# Altium PCB lpf.PcbDoc
Units mm, origin at the board's own origin, x right, y up, seen from the top; angles counter-clockwise.
Board outline 50.25 x 50.25 mm, 2 copper layers (Top Layer, Bottom Layer); 47 components, 39 nets, 120 pads, 0 vias.
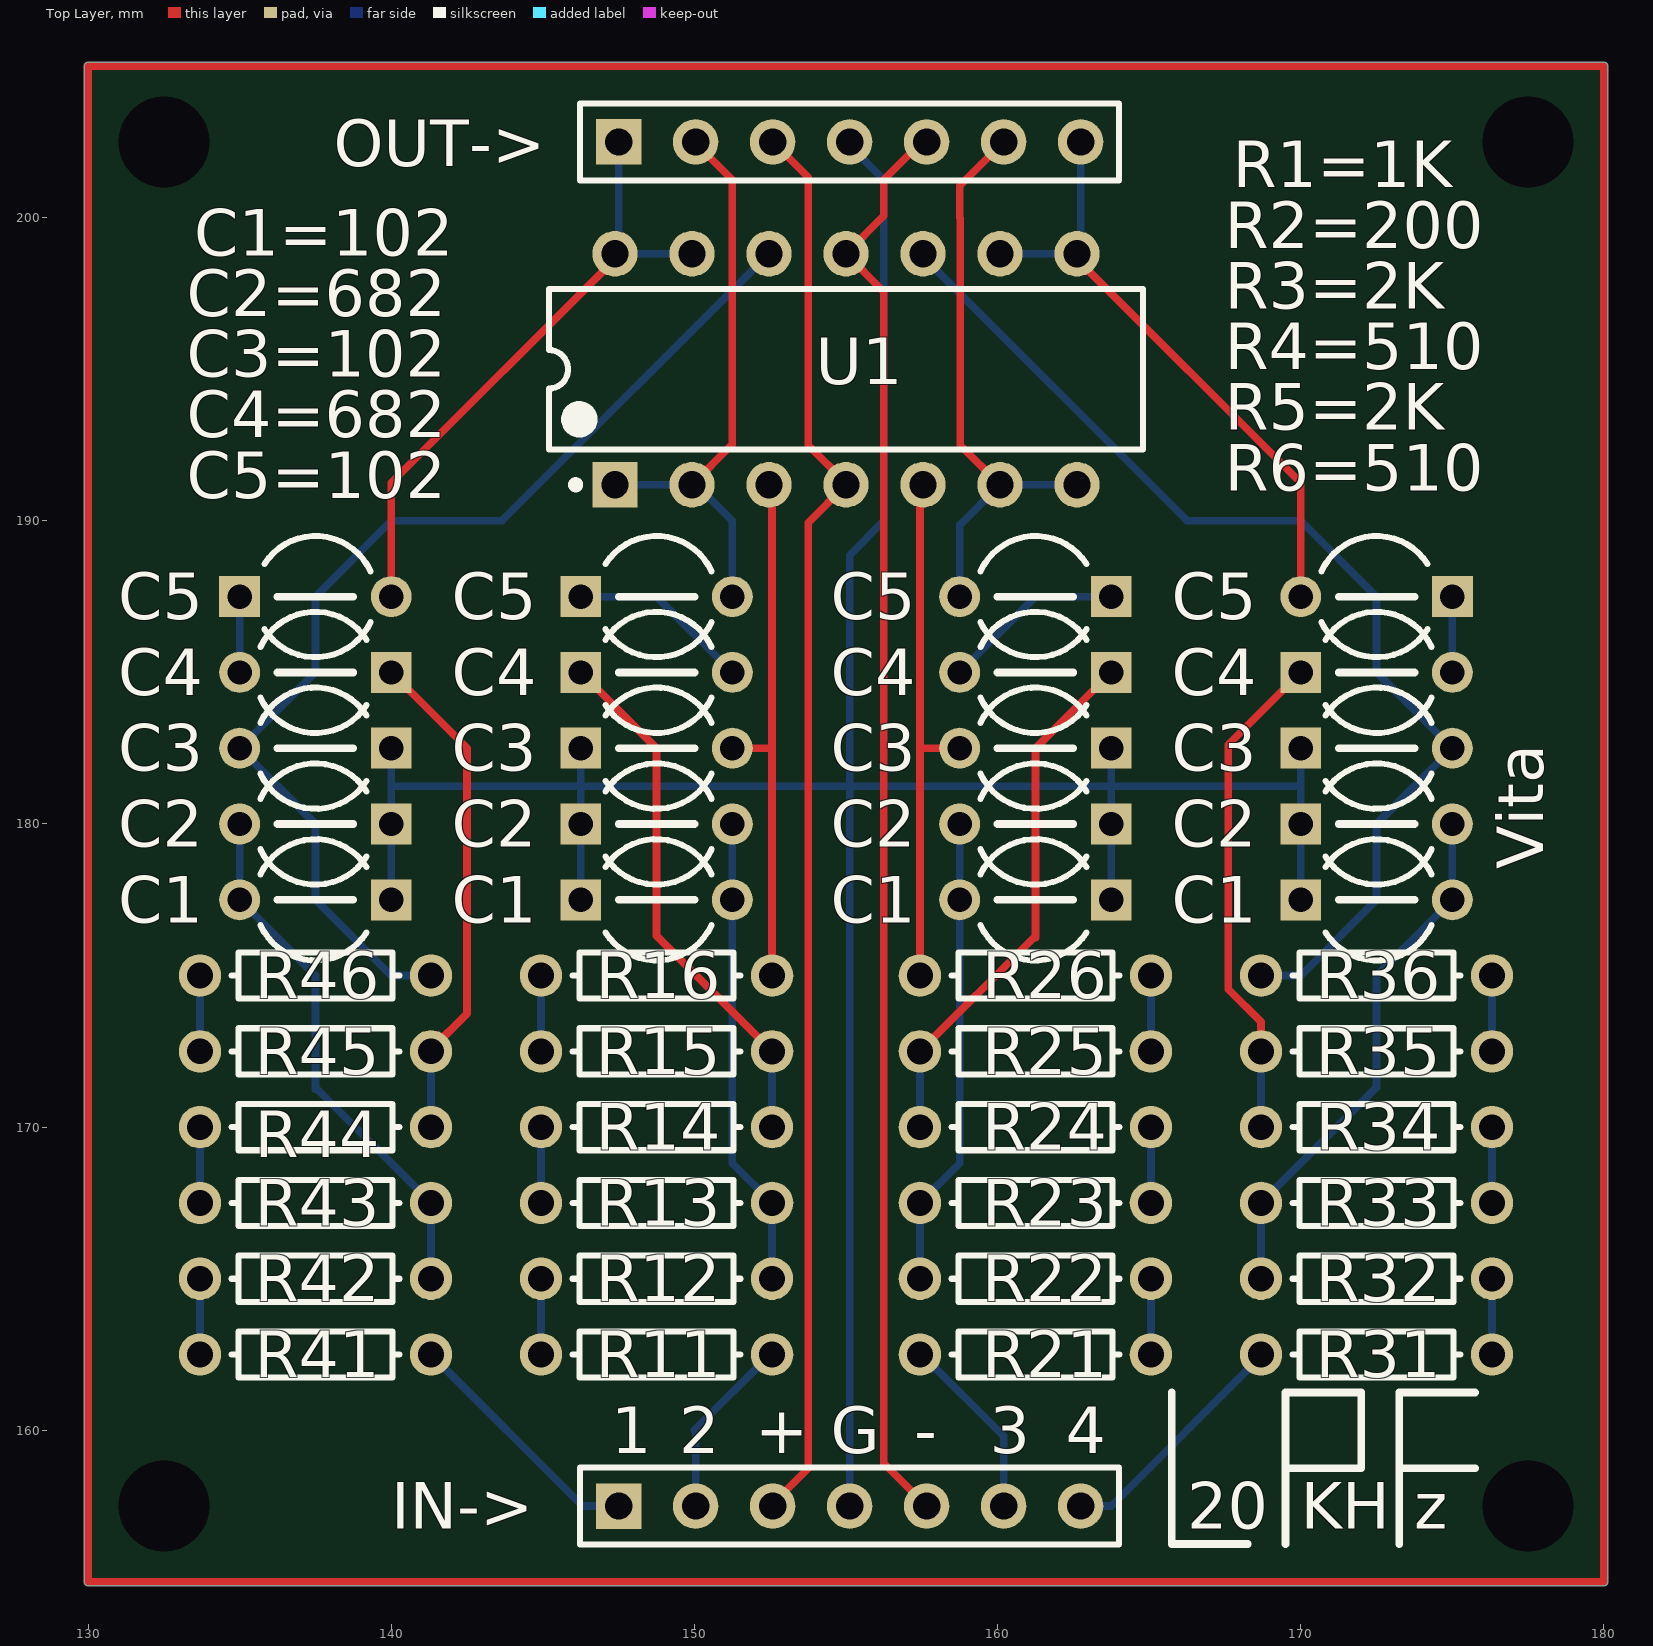
[diagram p0: Top Layer view]
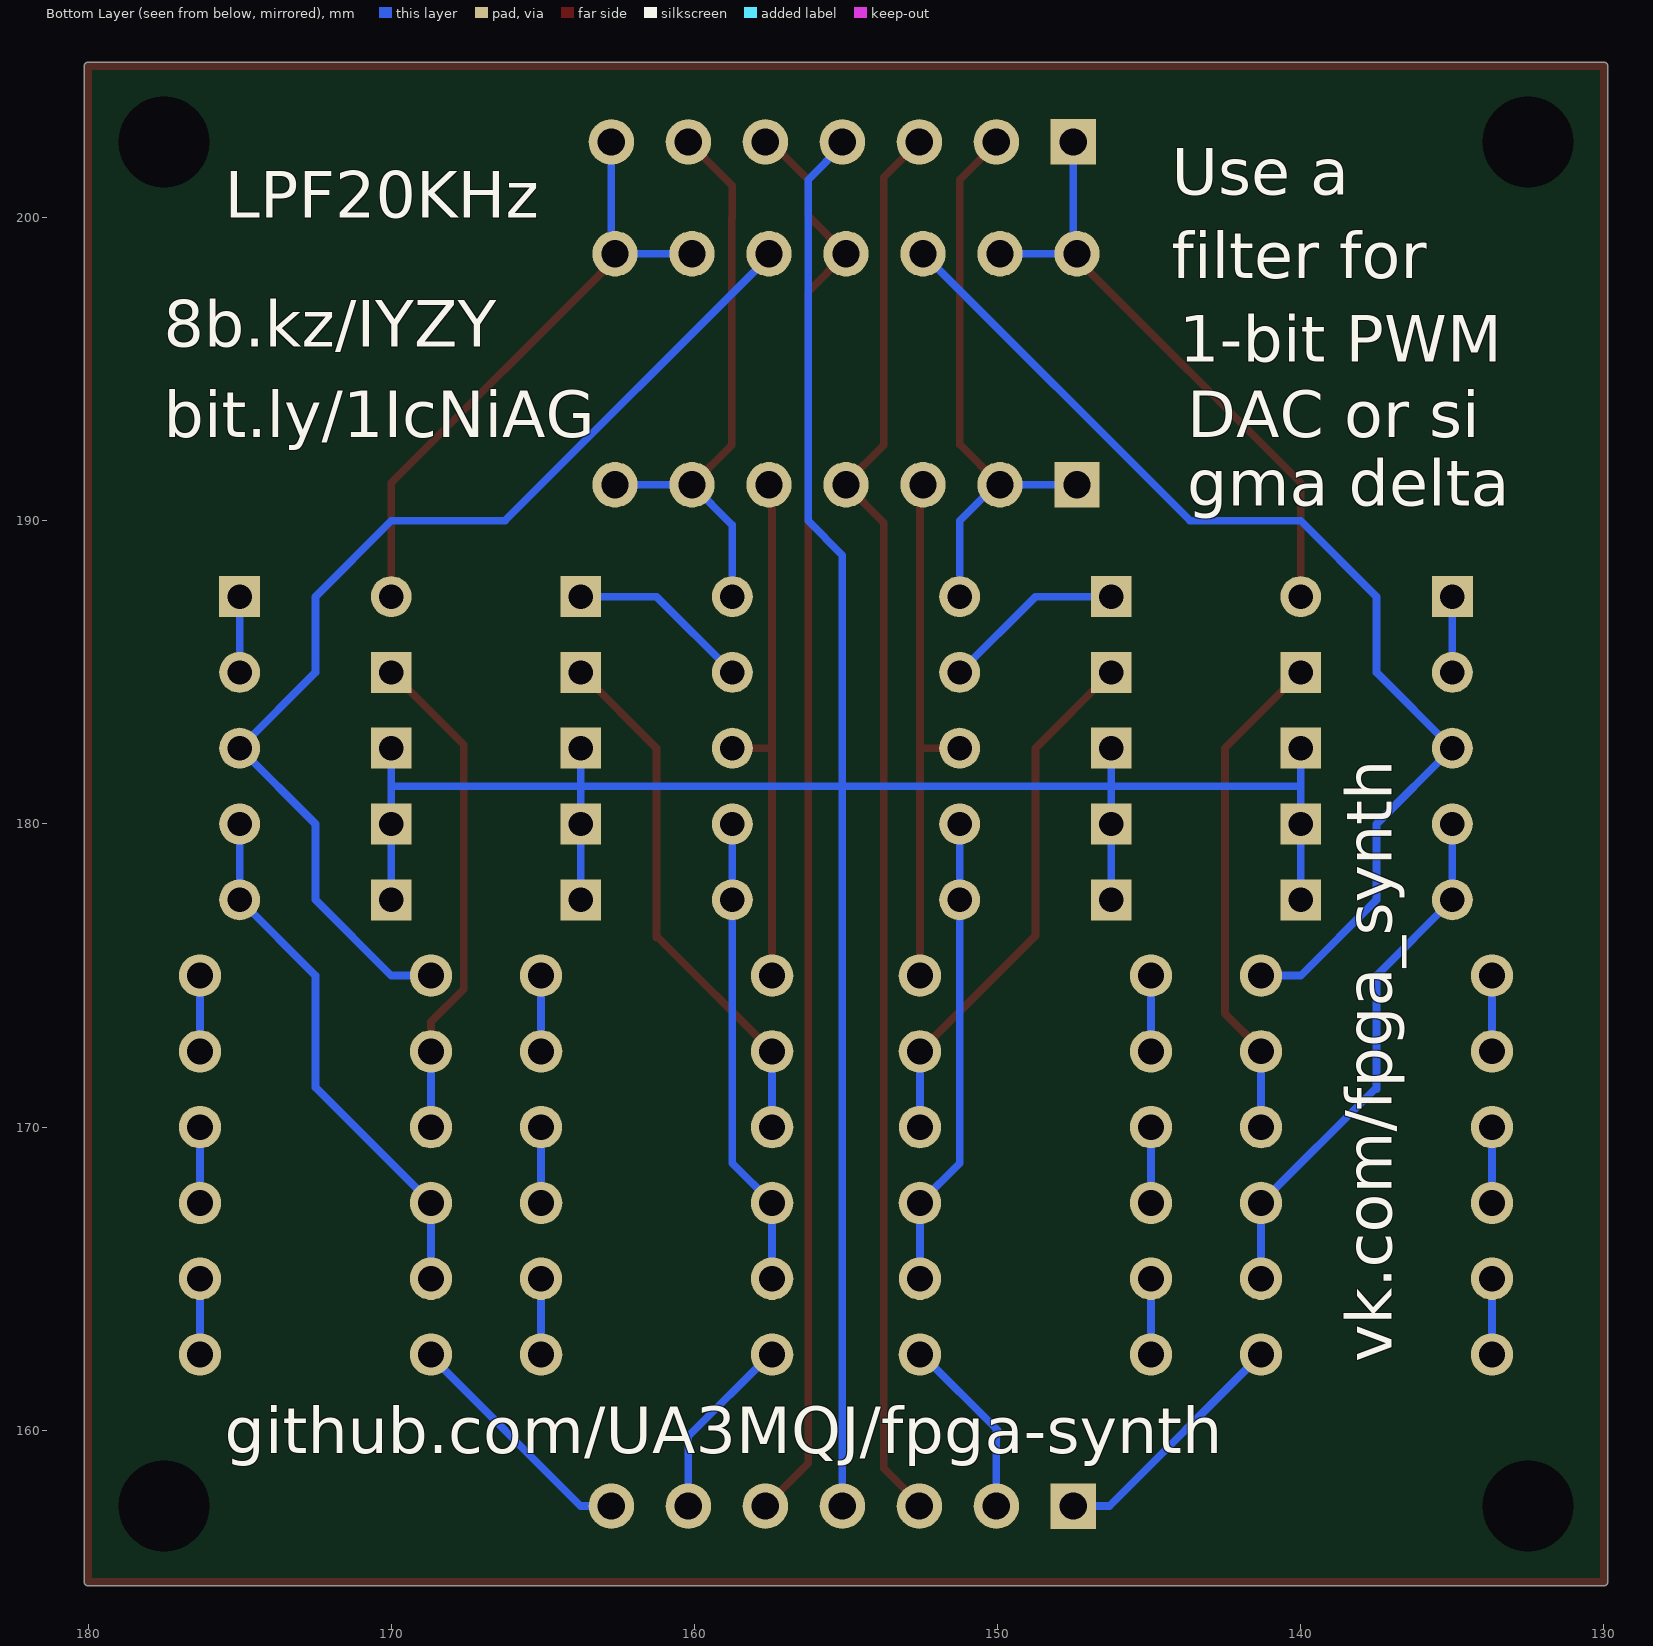
[diagram p1: Bottom Layer view, seen from below]

## Layer stack, top to bottom
Top Solder: solder mask 0.0102, Solder Resist, Dk 3.5
Top Layer: signal copper 0.0356
Dielectric 1: dielectric 0.32, FR-4, Dk 4.8
Bottom Layer: signal copper 0.0356
Bottom Solder: solder mask 0.0102, Solder Resist, Dk 3.5

## Board outline
130,154.873 cw(c130,155) 129.873,155 129.873,205 cw(c130,205) 130,205.127 180,205.127 cw(c180,205) 180.127,205 180.127,155 cw(c180,155) 180,154.873

## Design rules (kind name [scope] priority, off if disabled: settings)
Clearance [All] p1: gap=0.254
PolygonConnect [All] p1: connectstyle=Relief reliefconductorwidth=0.254 reliefentries=4 polygonreliefangle="90 Angle" airgapwidth=0.254
RoutingVias [All] p1: holewidth=0.711 width=1.27 viastyle="Through Hole" minholewidth=0.711 minwidth=1.27 maxholewidth=0.711 maxwidth=1.27
SolderMaskExpansion [All] p1: expansion=0.102
Width [All] p1: maxlimit=0.254 minlimit=0.254 preferedwidth=0.254
29 further rules are at their usual default settings.

## Classes and differential pairs
component class lpf: 1 C1 C2 C3 C4 C5 OUT-> P_vcc2 R11 R12 R13 R14 R15 R16 R21 R22 R23 R24 R25 R26 R31 R32 R33 R34 R35 R36 R41 R42 R43 R44 R46 U1

## Components (designator, comment, footprint, x,y, rotation, side; value= is the part's Value field where it differs from the comment)
1 "Header 7" HDR1X7 147.5,157.5 r0 top (schematic designator P_in)
C1 "Cap2" CAPR5-4X5 148.75,177.5 r0 top (schematic designator C11)
C1 "Cap2" CAPR5-4X5 137.5,177.5 r180 top (schematic designator C41)
C1 "Cap2" CAPR5-4X5 172.5,177.5 r0 top (schematic designator C31)
C1 "Cap2" CAPR5-4X5 161.25,177.5 r180 top (schematic designator C21)
C2 "Cap2" CAPR5-4X5 137.5,180 r180 top (schematic designator C42)
C2 "Cap2" CAPR5-4X5 172.5,180 r0 top (schematic designator C32)
C2 "Cap2" CAPR5-4X5 161.25,180 r180 top (schematic designator C22)
C2 "Cap2" CAPR5-4X5 148.75,180 r0 top (schematic designator C12)
C3 "Cap2" CAPR5-4X5 137.5,182.5 r180 top (schematic designator C43)
C3 "Cap2" CAPR5-4X5 172.5,182.5 r0 top (schematic designator C33)
C3 "Cap2" CAPR5-4X5 161.25,182.5 r180 top (schematic designator C23)
C3 "Cap2" CAPR5-4X5 148.75,182.5 r0 top (schematic designator C13)
C4 "Cap2" CAPR5-4X5 137.5,185 r180 top (schematic designator C44)
C4 "Cap2" CAPR5-4X5 172.5,185 r0 top (schematic designator C34)
C4 "Cap2" CAPR5-4X5 161.25,185 r180 top (schematic designator C24)
C4 "Cap2" CAPR5-4X5 148.75,185 r0 top (schematic designator C14)
C5 "Cap2" CAPR5-4X5 137.5,187.5 r0 top (schematic designator C45)
C5 "Cap2" CAPR5-4X5 172.5,187.5 r180 top (schematic designator C35)
C5 "Cap2" CAPR5-4X5 161.25,187.5 r180 top (schematic designator C25)
C5 "Cap2" CAPR5-4X5 148.75,187.5 r0 top (schematic designator C15)
OUT-> "Header 7" HDR1X7 147.5,202.5 r0 top (schematic designator P_out)
R11 "Res1" AXIAL-0.3 148.75,162.5 r180 top
R12 "Res1" AXIAL-0.3 148.75,165 r0 top
R13 "Res1" AXIAL-0.3 148.75,167.5 r180 top
R14 "Res1" AXIAL-0.3 148.75,170 r0 top
R15 "Res1" AXIAL-0.3 148.75,172.5 r180 top
R16 "Res1" AXIAL-0.3 148.75,175 r0 top
R21 "Res1" AXIAL-0.3 161.25,162.5 r0 top
R22 "Res1" AXIAL-0.3 161.25,165 r180 top
R23 "Res1" AXIAL-0.3 161.25,167.5 r0 top
R24 "Res1" AXIAL-0.3 161.25,170 r180 top
R25 "Res1" AXIAL-0.3 161.25,172.5 r0 top
R26 "Res1" AXIAL-0.3 161.25,175 r180 top
R31 "Res1" AXIAL-0.3 172.5,162.5 r0 top
R32 "Res1" AXIAL-0.3 172.5,165 r180 top
R33 "Res1" AXIAL-0.3 172.5,167.5 r0 top
R34 "Res1" AXIAL-0.3 172.5,170 r180 top
R35 "Res1" AXIAL-0.3 172.5,172.5 r0 top
R36 "Res1" AXIAL-0.3 172.5,175 r180 top
R41 "Res1" AXIAL-0.3 137.5,162.5 r180 top
R42 "Res1" AXIAL-0.3 137.5,165 r0 top
R43 "Res1" AXIAL-0.3 137.5,167.5 r180 top
R44 "Res1" AXIAL-0.3 137.5,170 r0 top
R45 "Res1" AXIAL-0.3 137.5,172.5 r180 top
R46 "Res1" AXIAL-0.3 137.5,175 r0 top
U1 "LT1125ACN" LT-N-14 155,195 r90 top

## Footprints (in the part's own frame and the unit in brackets; to place one, negate y for a bottom-side part, rotate by r counter-clockwise, add the part's x,y. Pads: shape width x height; smd on the part's side, far side on the other; paste and mask are expansions set on the pad)
AXIAL-0.3 [mm] "Axial Device, Thru-Hole; 2 Leads; 0.3 in Pin Spacing"
  round 1.4 hole 0.85: 1(-3.81,0) 2(3.81,0)
  silkscreen extent -2.77,-0.76 2.77,0.76
CAPR5-4X5 [mm] "Capacitor; 2 Leads"
  rect 1.35x1.35 hole 0.8: 1(-2.5,0)
  round 1.35 hole 0.8: 2(2.5,0)
  silkscreen extent -1.69,-2 1.82,2
HDR1X7 [mm] "Connector; Header; 7 Position"
  rect 1.5x1.5 hole 0.9: 1(0,0)
  round 1.5 hole 0.9: 2(2.54,0) 3(5.08,0) 4(7.62,0) 5(10.16,0) 6(12.7,0) 7(15.24,0)
  silkscreen extent -1.27,-1.27 16.51,1.27
LT-N-14 [mm] "DIP, 14-Leads, Body 19.558x6.477mm, Pitch 2.54mm"
  rect 1.5x1.5 hole 0.9: 1(-3.81,7.62)
  round 1.5 hole 0.9: 2(-3.81,5.08) 3(-3.81,2.54) 4(-3.81,0) 5(-3.81,-2.54) 6(-3.81,-5.08) 7(-3.81,-7.62) 8(3.81,-7.62) 9(3.81,-5.08) 10(3.81,-2.54) 11(3.81,0) 12(3.81,2.54) 13(3.81,5.08) 14(3.81,7.62)
  silkscreen extent -3.93,-9.8 2.65,9.8, body extent -3.95,-9.77 3.95,9.77, height 3.94

## Part data
1 OUT->: "Header, 7-Pin"
C1 C1 C1 C1 C2 C2 C2 C2 C3 C3 C3 C3 C4 C4 C4 C4 C5 C5 C5 C5: "Capacitor"
R11 R12 R13 R14 R15 R16 R21 R22 R23 R24 R25 R26 R31 R32 R33 R34 R35 R36 R41 R42 R43 R44 R45 R46: "Resistor"
U1: "Quad Channel, Low Noise Precision Operational Amplifier, Low 1/f Corner, 12.5 MHz Typical GBW, 4.5 V/us Typical SR, 8 to 44 V, 14-Pin DIP (N-14), Commercial"

## Free pads (board coordinates)
  round 1.524 hole 3 unplated: 0(132.5,157.5) 0(132.5,202.5) 0(177.5,157.5) 0(177.5,202.5)

## Nets (pads, with @x,y where several pads share a name; then routed paths per layer and width w, separated by ;. In a path a pad name is that pad's centre, name@x,y a point inside that pad or via, vN(x,y) a via of type N, cw(c..) or ccw(c..) an arc to the next point about the centre after c; other vN are vias at no path point)
GND: 1.4 C1.1 C2.1 C3.1 OUT->.4 | length 95.9
  Bottom Layer w0.254: C1.1@140,177.5 140,180 140,181.25 ; C3.1@140,182.5 140,181.25 ; C1.1@146.25,177.5 146.25,180 146.25,181.25 ; C3.1@146.25,182.5 146.25,181.25 ; 1.4 155.12,181.25 ; OUT->.4 155.12,202.38 156.25,201.25 156.25,190 155.12,188.87 155.12,181.25 ; C1.1@163.75,177.5 163.75,180 163.75,181.25 ; C3.1@163.75,182.5 163.75,181.25 ; C1.1@170,177.5 170,180 170,181.25 ; C3.1@170,182.5 170,181.25 ; 140,181.25 146.25,181.25 ; 146.25,181.25 155.12,181.25 ; 155.12,181.25 163.75,181.25 ; 163.75,181.25 170,181.25
IN1: 1.1 R41.1 | length 8.3
  Bottom Layer w0.254: R41.1 146.31,157.5 1.1
IN2: 1.2 R11.1 | length 6.1
  Bottom Layer w0.254: 1.2 150.04,159.96 150,160 152.5,162.5 R11.1
IN3: 1.6 R21.1 | length 6.2
  Bottom Layer w0.254: R21.1 157.5,162.5 160.2,159.8 1.6
IN4: 1.7 R31.1 | length 8.1
  Top Layer w0.254: R31.1@168.69,162.44 R31.1
  Bottom Layer w0.254: 1.7 163.75,157.5 168.69,162.44 R31.1
NetC11_2: C1.2@151.25,177.5 C2.2@151.25,180 R12.2 R13.1 | length 15.5
  Bottom Layer w0.254: C2.2@151.25,180 151.25,177.5 151.25,168.81 R13.1 R12.2
NetC13_2: C3.2@151.25,182.5 R16.2 U1.3 | length 17.5
  Top Layer w0.254: C3.2@151.25,182.5 152.56,182.5 ; U1.3 152.56,191.09 152.56,182.5 ; R16.2 152.56,182.5
NetC14_1: C4.1@146.25,185 R14.2 R15.1 | length 17.6
  Top Layer w0.254: C4.1@146.25,185 148.75,182.5 148.75,176.31 R15.1
  Bottom Layer w0.254: R14.2 R15.1
NetC14_2: C4.2@151.25,185 C5.1@146.25,187.5 | length 6
  Bottom Layer w0.254: C5.1@146.25,187.5 148.75,187.5 C4.2@151.25,185
NetC21_2: C1.2@158.75,177.5 C2.2@158.75,180 R22.2 R23.1 | length 15.5
  Bottom Layer w0.254: R23.1 158.75,168.81 158.75,177.5 C2.2@158.75,180 ; R22.2 R23.1
NetC23_2: C3.2@158.75,182.5 R26.2 U1.5 | length 17.5
  Top Layer w0.254: R26.2 157.44,182.5 ; U1.5 157.44,191.09 157.44,182.5 ; C3.2@158.75,182.5 157.44,182.5
NetC24_1: C4.1@163.75,185 R24.2 R25.1 | length 17.6
  Top Layer w0.254: R25.1 161.19,176.25 161.25,176.25 161.25,182.5 C4.1@163.75,185
  Bottom Layer w0.254: R24.2 R25.1
NetC24_2: C4.2@158.75,185 C5.1@163.75,187.5 | length 6
  Bottom Layer w0.254: C4.2@158.75,185 161.25,187.5 C5.1@163.75,187.5
NetC31_2: C1.2@175,177.5 C2.2@175,180 R32.2 R33.1 | length 17.7
  Top Layer w0.254: R33.1 R33.1@168.75,167.5
  Bottom Layer w0.254: R32.2 R33.1 172.5,171.31 172.5,175 175,177.5 C2.2@175,180
NetC33_2: C3.2@175,182.5 R36.2 U1.10 | length 36.6
  Bottom Layer w0.254: U1.10 157.54,198.71 166.25,190 170,190 172.5,187.5 172.5,185 175,182.5 172.5,180 172.5,177.5 170,175 R36.2
NetC34_1: C4.1@170,185 R34.2 R35.1 | length 16.4
  Top Layer w0.254: R35.1 168.69,173.471 167.609,174.552 167.609,182.609 C4.1@170,185
  Bottom Layer w0.254: R34.2 R35.1
NetC34_2: C4.2@175,185 C5.1@175,187.5 | length 2.5
  Bottom Layer w0.254: C4.2@175,185 C5.1@175,187.5
NetC41_2: C1.2@135,177.5 C2.2@135,180 R42.2 R43.1 | length 17.6
  Bottom Layer w0.254: C2.2@135,180 135,177.5 137.5,175 137.5,171.25 137.56,171.25 R43.1 R42.2
NetC43_2: C3.2@135,182.5 R46.2 U1.12 | length 36.6
  Bottom Layer w0.254: R46.2 140,175 137.5,177.5 137.5,180 135,182.5 137.5,185 137.5,187.5 140,190 143.65,190 U1.12
NetC44_1: C4.1@140,185 R44.2 R45.1 | length 16.5
  Top Layer w0.254: C4.1@140,185 142.5,182.5 142.5,173.75 141.31,172.56 R45.1
  Bottom Layer w0.254: R44.2 R45.1
NetC44_2: C4.2@135,185 C5.1@135,187.5 | length 2.5
  Bottom Layer w0.254: C4.2@135,185 C5.1@135,187.5
NetR11_2: R11.2 R12.1 | length 2.5
  Bottom Layer w0.254: R11.2 R12.1
NetR13_2: R13.2 R14.1 | length 2.5
  Bottom Layer w0.254: R13.2 R14.1
NetR15_2: R15.2 R16.1 | length 2.5
  Bottom Layer w0.254: R15.2 R16.1
NetR21_2: R21.2 R22.1 | length 2.5
  Bottom Layer w0.254: R21.2 R22.1
NetR23_2: R23.2 R24.1 | length 2.5
  Bottom Layer w0.254: R23.2 R24.1
NetR25_2: R25.2 R26.1 | length 2.5
  Bottom Layer w0.254: R25.2 R26.1
NetR31_2: R31.2 R32.1 | length 2.5
  Bottom Layer w0.254: R31.2 R32.1
NetR33_2: R33.2 R34.1 | length 2.5
  Bottom Layer w0.254: R33.2 R34.1
NetR35_2: R35.2 R36.1 | length 2.5
  Bottom Layer w0.254: R35.2 R36.1
NetR41_2: R41.2 R42.1 | length 2.5
  Bottom Layer w0.254: R41.2 R42.1
NetR43_2: R43.2 R44.1 | length 2.5
  Bottom Layer w0.254: R43.2 R44.1
NetR45_2: R45.2 R46.1 | length 2.5
  Bottom Layer w0.254: R45.2 R46.1
OUT1: C5.2@140,187.5 OUT->.1 U1.13 U1.14 | length 20.8
  Top Layer w0.254: C5.2@140,187.5 140,191.25 147.38,198.63 U1.14 ; OUT->.1@147.38,202.38 OUT->.1
  Bottom Layer w0.254: OUT->.1 147.5,198.93 U1.14 U1.13
OUT2: C5.2@151.25,187.5 OUT->.2 U1.1 U1.2 | length 19.2
  Top Layer w0.254: U1.2 151.25,192.52 151.25,201.25 150.04,202.46 OUT->.2
  Bottom Layer w0.254: U1.1 U1.2 150.06,191.19 151.25,190 C5.2@151.25,187.5
OUT3: C5.2@158.75,187.5 OUT->.6 U1.6 U1.7 | length 19.2
  Top Layer w0.254: U1.6 158.77,192.5 158.77,199.98 158.75,200 158.75,201.05 OUT->.6
  Bottom Layer w0.254: C5.2@158.75,187.5 158.75,189.86 U1.6 U1.7
OUT4: C5.2@170,187.5 OUT->.7 U1.8 U1.9 | length 20.8
  Top Layer w0.254: U1.8 162.62,198.63 170,191.25 C5.2@170,187.5 ; OUT->.7@162.62,202.38 OUT->.7
  Bottom Layer w0.254: U1.9 U1.8 162.74,198.93 OUT->.7
VCC+: 1.3 OUT->.3 U1.4 | length 47
  Top Layer w0.254: 1.3 152.58,157.58 153.75,158.75 153.75,189.94 U1.4 155,191.25 153.75,192.5 153.75,201.33 OUT->.3
VCC--: 1.5 OUT->.5 U1.11 | length 47.3
  Top Layer w0.254: 1.5 156.25,158.91 156.25,197.56 U1.11 156.25,200.06 156.25,201.25 157.5,202.5 OUT->.5
copper on no net: | length 200
  Top Layer w0.254: 130,155 130,205 180,205 180,155 130,155

## Silkscreen, mask and mechanical layers (free items; w line width, h text height)
Top Overlay:
  lines w0.254: 136.25,177.5 138.75,177.5 ; 136.25,180 138.75,180 ; 136.25,182.5 138.75,182.5 ; 136.25,185 138.75,185 ; 136.25,187.5 138.75,187.5 ; 147.5,177.5 150,177.5 ; 147.5,180 150,180 ; 147.5,182.5 150,182.5 ; 147.5,185 150,185 ; 147.5,187.5 150,187.5 ; 160,177.5 162.5,177.5 ; 160,180 162.5,180 ; 160,182.5 162.5,182.5 ; 160,185 162.5,185 ; 160,187.5 162.5,187.5 ; 165.75,161.25 165.75,156.25 168.25,156.25 ; 169.5,156.25 169.5,161.25 172,161.25 172,158.75 169.5,158.75 ; 171.25,177.5 173.75,177.5 ; 171.25,180 173.75,180 ; 171.25,182.5 173.75,182.5 ; 171.25,185 173.75,185 ; 171.25,187.5 173.75,187.5 ; 173.25,156.25 173.25,161.25 175.75,161.25 ; 173.25,158.75 175.75,158.75
  text "R1=1K" at 167.75,201 h1.52
  text "R2=200" at 167.5,199 h1.52
  text "C1=102" at 133.5,198.75 h1.52
  text "R3=2K" at 167.5,197 h1.52
  text "C2=682" at 133.25,196.75 h1.52
  text "R4=510" at 167.5,195 h1.52
  text "C3=102" at 133.25,194.75 h1.52
  text "R5=2K" at 167.5,193 h1.52
  text "C4=682" at 133.25,192.75 h1.52
  text "R6=510" at 167.5,191 h1.52
  text "C5=102" at 133.25,190.75 h1.52
  text "Vita" at 178,178.5 h1.52 r90
  text "2" at 149.5,159.25 h1.52
  text "+" at 152,159.25 h1.52
  text "G" at 154.5,159.25 h1.52
  text "-" at 157.25,159.25 h1.52
  text "3" at 159.75,159.25 h1.52
  text "4" at 162.25,159.25 h1.52
  text "IN->" at 140,156.75 h1.52
  text "20" at 166.25,156.75 h1.52
  text "KH" at 170,156.75 h1.52
  text "z" at 173.75,156.75 h1.52
Bottom Overlay:
  text "Use a" at 144.25,200.75 h1.52
  text "LPF20KHz" at 175.5,200 h1.52
  text "filter for" at 144.25,198 h1.52
  text "8b.kz/IYZY" at 177.5,195.75 h1.52
  text "1-bit PWM" at 144,195.25 h1.52
  text "DAC or si" at 143.75,192.75 h1.52
  text "bit.ly/1IcNiAG" at 177.5,192.75 h1.52
  text "gma delta" at 143.75,190.5 h1.52
  text "vk.com/fpga_synth" at 137,162.25 h1.52 r270
  text "github.com/UA3MQJ/fpga-synth" at 175.5,159.25 h1.52